# Altium PCB Sinistro_TestBed_RevA-1.PcbDoc (part 4 of 4)
Units mil, origin at the board's own origin, x right, y up, seen from the top; angles counter-clockwise.
Board outline 17000 x 8000 mil, 7 copper layers (Top Layer (*.GTL), MidLayer1 (*.G1), MidLayer2 (*.G2), MidLayer3 (*.G3), DIG GND (*.GP1), AGND (*.GP2), Bottom Layer (*.GBL)); 262 components, 309 nets, 2223 pads, 663 vias.
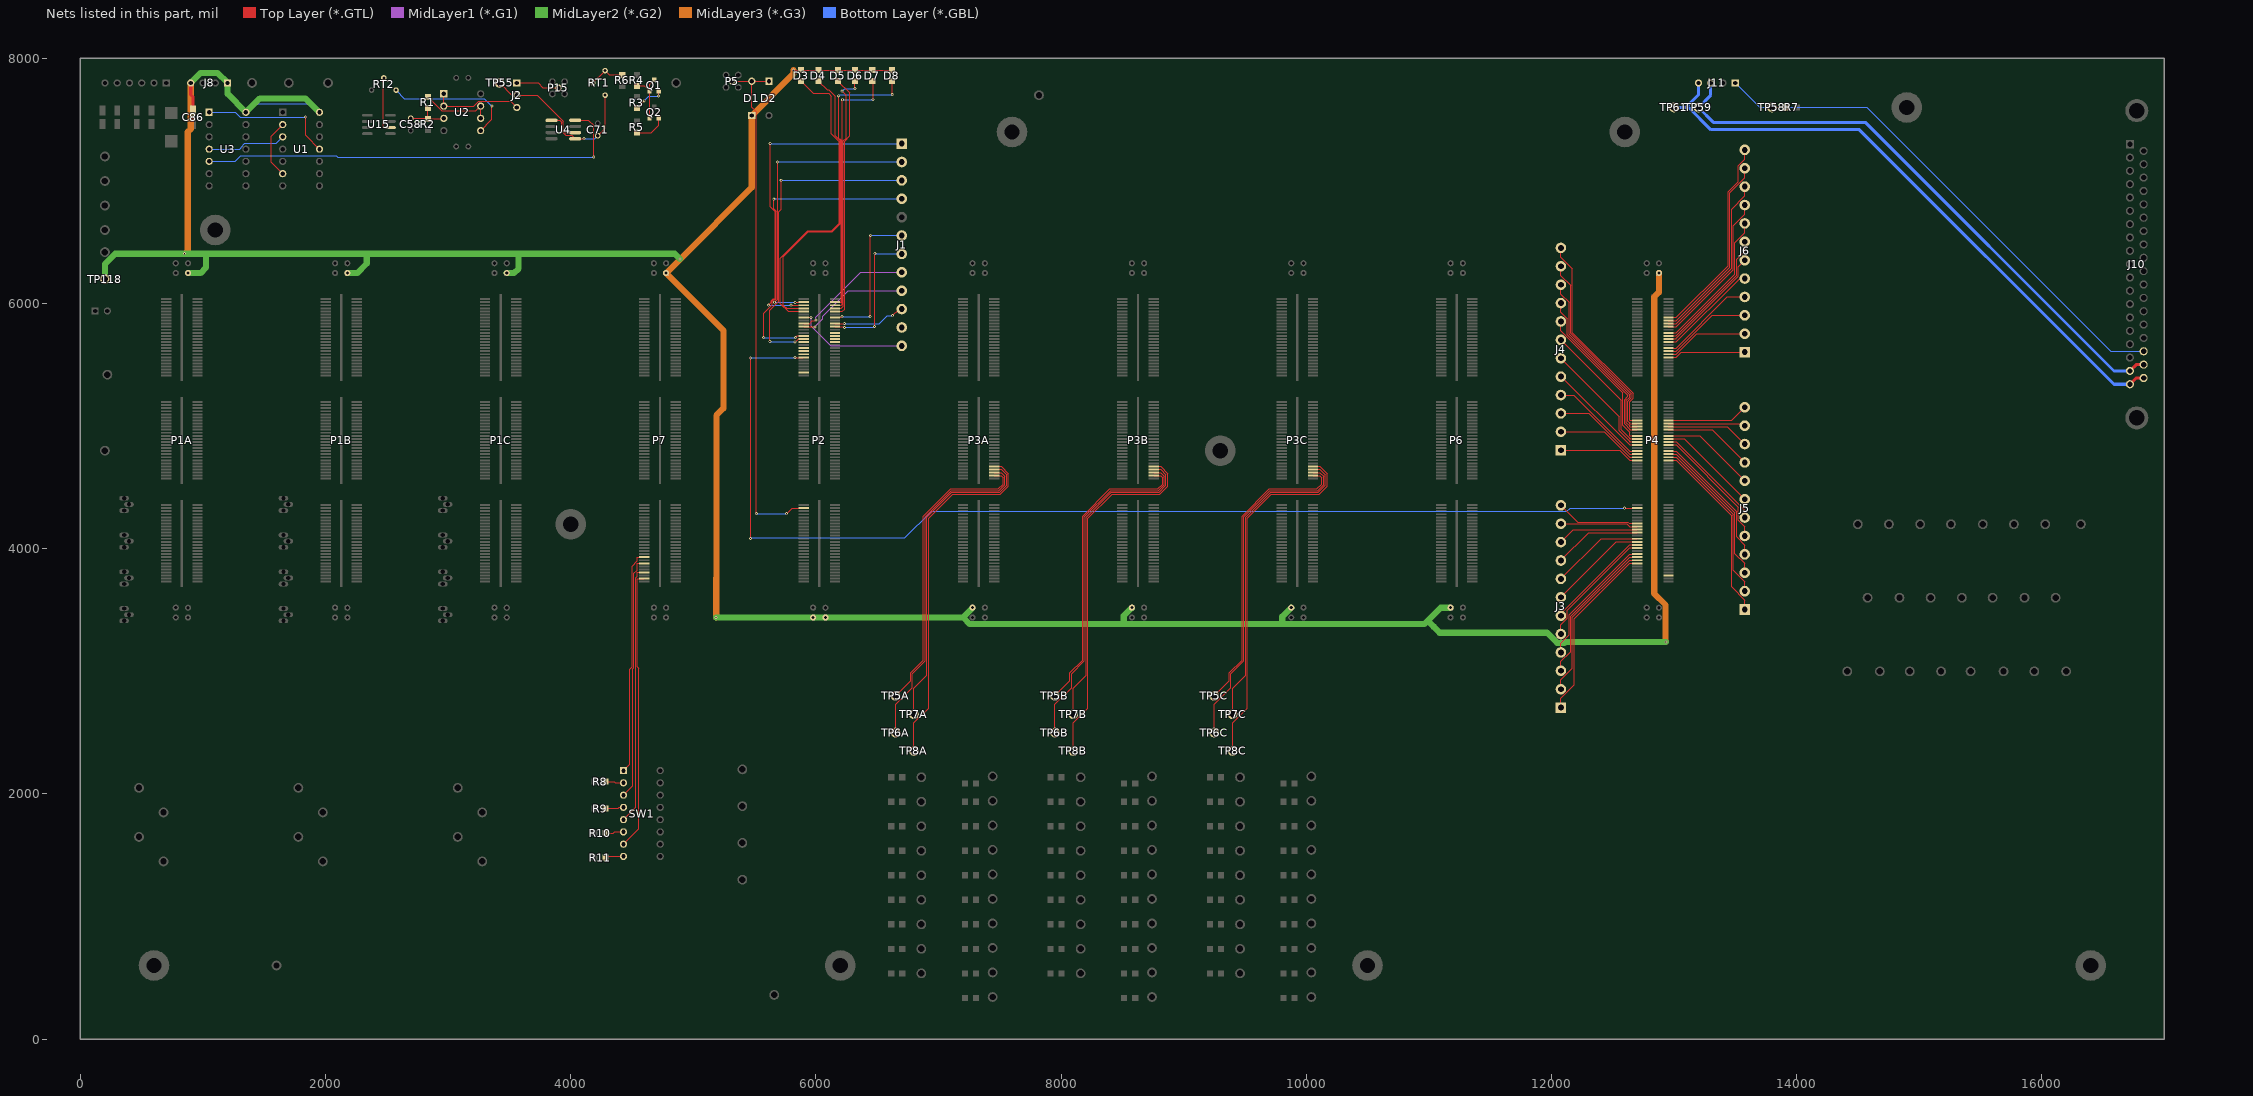
[diagram p9: the nets of this part, all layers, seen from the top]

## Via types
v1: diameter 24, hole 10, Top Layer (*.GTL) to Bottom Layer (*.GBL), 662 vias
v2: diameter 10, hole 10, Top Layer (*.GTL) to Bottom Layer (*.GBL), 1 vias

## Nets (pads, with @x,y where several pads share a name; then routed paths per layer and width w, separated by ;. In a path a pad name is that pad's centre, name@x,y a point inside that pad or via, vN(x,y) a via of type N, cw(c..) or ccw(c..) an arc to the next point about the centre after c; other vN are vias at no path point) (continued)
GPS_1HZ: D1.1 D2.2 P2.49 P5.1 | length 4249.3
  Top Layer (*.GTL) w5: P5.1@5317,7814 5317.24,7813.76 D1.1@5477,7813.76 ; v1@5511,4286 5513.03,4288.03 5513.03,7566.46 5477,7602.48 D1.1@5477,7813.76 ; D2.2@5617,7813.76 D1.1@5477,7813.76 ; v1(5761,4286) 5761,4287 5805.26,4331.26 P2.49@5900.4,4331.26
  Bottom Layer (*.GBL) w5: v1(5514.03,4286) v1(5761,4286)
I_ADDR0_A: P2.107
LED_1: D3.CATH P2.147 | length 2548.2
  Top Layer (*.GTL) w5: D3.CATH@5880,7815 5980,7715 6104,7715 6126,7693 6126,7385.27 6185.27,7326 6189,7326 6189,6655 6129,6595 5934.27,6595 5709,6369.73 5709,6000.27 5772.7,5936.58 P2.147@5900.4,5936.58
LED_2: D4.CATH P2.149 | length 2393.9
  Top Layer (*.GTL) w5: P2.149@5900.4,5961.58 5760.43,5961.58 5735,5987 5735,6383 5938,6586 6132.73,6586 6198,6651.27 6198,7329.73 6192.73,7335 6189,7335 6156,7368 6156,7693 6105,7744 6091,7744 D4.CATH@6020,7815
LED_3: D5.CATH P2.148 | length 2003.3
  Top Layer (*.GTL) w5: P2.148@6155.52,5936.58 6215.57,5936.58 6234,5955 6234,7326 6276,7368 6276,7719 D5.CATH@6180,7815
LED_4: D6.CATH P2.150 | length 2026.3
  Top Layer (*.GTL) w5: P2.150@6155.52,5961.58 6207,5961.58 6225,5979.58 6225,7329.73 6246,7350.73 6246,7701 v1(6214,7733) ; v1(6318,7755) 6318,7813 D6.CATH@6320,7815
  Bottom Layer (*.GBL) w5: v1(6214,7733) 6235,7754 6317,7754 v1(6318,7755)
LED_5: D7.CATH P2.152 | length 2134.4
  Top Layer (*.GTL) w5: P2.152@6155.52,5986.58 6207,5986.58 6216,5995.58 v1(6216,7663) ; D7.CATH@6460,7815 6466,7809 v1(6466,7666)
  Bottom Layer (*.GBL) w5: v1(6216,7663) 6463,7663 v1(6466,7666)
LED_6: D8.CATH P2.154 | length 2298.8
  Top Layer (*.GTL) w5: P2.154@6155.52,6011.58 6207,6011.58 6207,7333.46 6196.46,7344 6192.73,7344 6186,7350.73 v1(6186,7695) ; D8.CATH@6620,7815 6623,7812 v1(6623,7704)
  Bottom Layer (*.GBL) w5: v1(6186,7695) 6195,7704 v1(6623,7704)
NetC58_2: C58.2 R1.1 R2.2 U2.3 | length 364.1
  Top Layer (*.GTL) w10: C58.2@2695,7511 2830,7511 R2.2@2835,7506 ; R1.1@2835,7596 R2.2@2835,7506 ; U2.3@2965,7511 2960,7506 R2.2@2835,7506
NetC71_1: C71.1 RT1.1 U4.1 U4.5 | length 847.7
  Top Layer (*.GTL) w10: U4.1@3843.54,7495 3911.2,7495 3926,7480.2 3926,7405.2 3958.98,7372.22 4009.24,7372.22 U4.5@4036.46,7345 v1(4109,7345) ; C71.1@4220,7370 4280,7430 RT1.1@4280,7700
  Bottom Layer (*.GBL) w10: v1(4109,7345) 4195,7345 C71.1@4220,7370
NetJ2_1: J2.1 P15.1 | length 356.6
  Top Layer (*.GTL) w10: J2.1@3560,7800 3733,7800 3773,7760 P15.1@3900,7760
NetJ2_2: J2.2 TP55.1 U4.6 | length 828.1
  Top Layer (*.GTL) w10: TP55.1@3420,7800 3520,7700 J2.2@3560,7700 3726,7700 3940,7486 3940,7411 3956,7395 U4.6@4036.46,7395
NetJ2_3: J2.3 U2.1 U2.2 | length 731.5
  Top Layer (*.GTL) w10: U2.1@2965,7711 U2.2@2965,7611 3210.51,7611 3249.04,7649.53 3510.47,7649.53 J2.3@3560,7600
NetJ3_1: J3.1 P4.13 | length 1532.5
  Top Layer (*.GTL) w10: J3.1@12077.96,2704.02 12077.96,2780.04 12186.27,2888.35 12186.27,3428.54 12638.98,3881.26 ; 12638.98,3881.26 P4.13@12700.4,3881.26 12638.98,3881.26
NetJ3_2: J3.2 P4.15 | length 1407.5
  Top Layer (*.GTL) w10: J3.2@12077.96,2854.02 12077.96,2930.04 12172.27,3024.35 12172.27,3439.54 12638.98,3906.26 ; 12638.98,3906.26 P4.15@12700.4,3906.26 12638.98,3906.26
NetJ3_3: J3.3 P4.17 | length 1282.5
  Top Layer (*.GTL) w10: J3.3@12077.96,3004.02 12077.96,3080.04 12158.27,3160.35 12158.27,3450.54 12638.98,3931.26 ; 12638.98,3931.26 P4.17@12700.4,3931.26 12638.98,3931.26
NetJ3_4: J3.4 P4.19 | length 1157.5
  Top Layer (*.GTL) w10: J3.4@12077.96,3154.02 12077.96,3230.04 12144.27,3296.35 12144.27,3461.54 12638.98,3956.26 ; 12638.98,3956.26 P4.19@12700.4,3956.26 12638.98,3956.26
NetJ3_5: J3.5 P4.23 | length 1057.5
  Top Layer (*.GTL) w10: J3.5@12077.96,3304.02 12077.96,3380.04 12130.27,3432.35 12130.27,3497.54 12638.98,4006.26 ; 12638.98,4006.26 P4.23@12700.4,4006.26 12638.98,4006.26
NetJ3_6: J3.6 P4.25 | length 932.5
  Top Layer (*.GTL) w10: J3.6@12077.96,3454.02 12077.96,3470.24 12638.98,4031.26 ; 12638.98,4031.26 P4.25@12700.4,4031.26 12638.98,4031.26
NetJ3_7: J3.7 P4.27 | length 871.2
  Top Layer (*.GTL) w10: J3.7@12077.96,3604.02 12530.2,4056.26 P4.27@12700.4,4056.26 12638.98,4056.26
NetJ3_8: J3.8 P4.29 | length 819.4
  Top Layer (*.GTL) w10: J3.8@12077.96,3754.02 12405.2,4081.26 P4.29@12700.4,4081.26 12638.98,4081.26
NetJ3_9: J3.9 P4.33 | length 778
  Top Layer (*.GTL) w10: J3.9@12077.96,3904.02 12305.2,4131.26 P4.33@12700.4,4131.26 12638.98,4131.26
NetJ3_10: J3.10 P4.35 | length 726.2
  Top Layer (*.GTL) w10: J3.10@12077.96,4054.02 12180.2,4156.26 P4.35@12700.4,4156.26 12638.98,4156.26
NetJ3_11: J3.11 P4.37 | length 693.3
  Top Layer (*.GTL) w10: J3.11@12077.96,4204.02 12616.23,4204.02 12638.98,4181.26 ; 12638.98,4181.26 P4.37@12700.4,4181.26 12638.98,4181.26
NetJ3_12: J3.12 P4.39 | length 745.1
  Top Layer (*.GTL) w10: J3.12@12077.96,4354.02 12213.96,4218.02 12622.03,4218.02 12633.78,4206.26 P4.39@12700.4,4206.26 12638.98,4206.26
NetJ4_1: J4.1 P4.65 | length 656.7
  Top Layer (*.GTL) w10: J4.1@12077.96,4804.02 12556.39,4804.02 12638.98,4721.42 P4.65@12700.4,4721.42
NetJ4_2: J4.2 P4.67 | length 708.4
  Top Layer (*.GTL) w10: J4.2@12077.96,4954.02 12431.39,4954.02 12638.98,4746.42 P4.67@12700.4,4746.42
NetJ4_3: J4.3 P4.69 | length 760.2
  Top Layer (*.GTL) w10: J4.3@12077.96,5104.02 12306.39,5104.02 12638.98,4771.42 P4.69@12700.4,4771.42
NetJ4_4: J4.4 P4.71 | length 812
  Top Layer (*.GTL) w10: J4.4@12077.96,5254.02 12181.39,5254.02 12638.98,4796.42 P4.71@12700.4,4796.42
NetJ4_5: J4.5 P4.75 | length 853.4
  Top Layer (*.GTL) w10: J4.5@12077.96,5404.02 12081.39,5404.02 12638.98,4846.42 P4.75@12700.4,4846.42
NetJ4_6: J4.6 P4.77 | length 976.4
  Top Layer (*.GTL) w10: J4.6@12077.96,5554.02 12554.98,5076.99 12554.98,4960.62 12638.98,4876.62 12638.98,4871.42 P4.77@12700.4,4871.42
NetJ4_7: J4.7 P4.79 | length 1101.4
  Top Layer (*.GTL) w10: J4.7@12077.96,5704.02 12568.98,5212.99 12568.98,4971.62 12638.98,4901.62 12638.98,4896.42 P4.79@12700.4,4896.42
NetJ4_8: J4.8 P4.81 | length 1226.4
  Top Layer (*.GTL) w10: J4.8@12077.96,5854.02 12077.96,5777.99 12582.98,5272.97 12582.98,5007.62 12638.98,4951.62 12638.98,4921.42 P4.81@12700.4,4921.42
NetJ4_9: J4.9 P4.85 | length 1349.6
  Top Layer (*.GTL) w10: J4.9@12077.96,6004.02 12077.96,5927.99 12130.27,5875.68 12130.27,5745.48 12624.98,5250.76 12624.98,5243.32 12596.98,5215.32 12596.98,5018.62 12638.98,4976.62 12638.98,4971.42 P4.85@12700.4,4971.42
NetJ4_10: J4.10 P4.87 | length 1474.6
  Top Layer (*.GTL) w10: J4.10@12077.96,6154.02 12077.96,6077.99 12144.27,6011.68 12144.27,5751.28 12638.98,5256.56 12638.98,5237.52 12610.98,5209.52 12610.98,5029.62 12638.98,5001.62 12638.98,4996.42 P4.87@12700.4,4996.42
NetJ4_11: J4.11 P4.89 | length 1599.6
  Top Layer (*.GTL) w10: J4.11@12077.96,6304.02 12077.96,6227.99 12158.27,6147.68 12158.27,5757.08 12652.98,5262.36 12652.98,5231.72 12624.98,5203.72 12624.98,5040.62 12638.98,5026.62 12638.98,5021.42 P4.89@12700.4,5021.42
NetJ4_12: J4.12 P4.91 | length 1724.6
  Top Layer (*.GTL) w10: J4.12@12077.96,6454.02 12077.96,6377.99 12172.27,6283.68 12172.27,5762.88 12666.98,5268.16 12666.98,5225.92 12638.98,5197.92 12638.98,5046.42 P4.91@12700.4,5046.42
NetJ5_1: J5.1 P4.66 | length 1512.4
  Top Layer (*.GTL) w10: P4.66@12955.52,4721.42 13018.91,4721.42 13469.65,4270.67 13469.65,3688.35 13577.96,3580.04 J5.1@13577.96,3504.02
NetJ5_2: J5.2 P4.68 | length 1387.4
  Top Layer (*.GTL) w10: P4.68@12955.52,4746.42 13018.91,4746.42 13483.65,4281.67 13483.65,3824.35 13577.96,3730.04 J5.2@13577.96,3654.02
NetJ5_3: J5.3 P4.70 | length 1262.4
  Top Layer (*.GTL) w10: P4.70@12955.52,4771.42 13018.91,4771.42 13497.65,4292.67 13497.65,3960.35 13577.96,3880.04 J5.3@13577.96,3804.02
NetJ5_4: J5.4 P4.72 | length 1137.4
  Top Layer (*.GTL) w10: P4.72@12955.52,4796.42 13018.91,4796.42 13511.65,4303.67 13511.65,4096.35 13577.96,4030.04 J5.4@13577.96,3954.02
NetJ5_5: J5.5 P4.76 | length 1037.4
  Top Layer (*.GTL) w10: P4.76@12955.52,4846.42 13018.91,4846.42 13525.65,4339.67 13525.65,4232.35 13577.96,4180.04 J5.5@13577.96,4104.02
NetJ5_6: J5.6 P4.78 | length 912.4
  Top Layer (*.GTL) w10: P4.78@12955.52,4871.42 13018.91,4871.42 13577.96,4312.36 J5.6@13577.96,4254.02
NetJ5_7: J5.7 P4.80 | length 826.4
  Top Layer (*.GTL) w10: P4.80@12955.52,4896.42 13085.56,4896.42 J5.7@13577.96,4404.02
NetJ5_8: J5.8 P4.82 | length 774.6
  Top Layer (*.GTL) w10: P4.82@12955.52,4921.42 13210.56,4921.42 J5.8@13577.96,4554.02
NetJ5_9: J5.9 P4.86 | length 733.2
  Top Layer (*.GTL) w10: P4.86@12955.52,4971.42 13310.56,4971.42 J5.9@13577.96,4704.02
NetJ5_10: J5.10 P4.88 | length 681.4
  Top Layer (*.GTL) w10: P4.88@12955.52,4996.42 13435.56,4996.42 J5.10@13577.96,4854.02
NetJ5_11: J5.11 P4.90 | length 629.6
  Top Layer (*.GTL) w10: P4.90@12955.52,5021.42 13560.56,5021.42 J5.11@13577.96,5004.02
NetJ5_12: J5.12 P4.92 | length 667
  Top Layer (*.GTL) w10: P4.92@12955.52,5046.42 13470.36,5046.42 J5.12@13577.96,5154.02
NetJ6_1: J6.1 P4.118 | length 640
  Top Layer (*.GTL) w10: P4.118@12955.52,5561.58 13018.91,5561.58 13061.35,5604.02 J6.1@13577.96,5604.02
NetJ6_2: J6.2 P4.120 | length 691.8
  Top Layer (*.GTL) w10: P4.120@12955.52,5586.58 13018.91,5586.58 13186.35,5754.02 J6.2@13577.96,5754.02
NetJ6_3: J6.3 P4.122 | length 743.6
  Top Layer (*.GTL) w10: P4.122@12955.52,5611.58 13018.91,5611.58 13311.35,5904.02 J6.3@13577.96,5904.02
NetJ6_4: J6.4 P4.124 | length 795.4
  Top Layer (*.GTL) w10: P4.124@12955.52,5636.58 13018.91,5636.58 13436.35,6054.02 J6.4@13577.96,6054.02
NetJ6_5: J6.5 P4.128 | length 836.8
  Top Layer (*.GTL) w10: P4.128@12955.52,5686.58 13018.91,5686.58 13536.35,6204.02 J6.5@13577.96,6204.02
NetJ6_6: J6.6 P4.130 | length 937.4
  Top Layer (*.GTL) w10: P4.130@12955.52,5711.58 13018.91,5711.58 13018.91,5716.78 13525.65,6223.52 13525.65,6301.71 J6.6@13577.96,6354.02
NetJ6_7: J6.7 P4.132 | length 1062.4
  Top Layer (*.GTL) w10: P4.132@12955.52,5736.58 13018.91,5736.58 13511.65,6229.32 13511.65,6361.68 13577.96,6427.99 J6.7@13577.96,6504.02
NetJ6_8: J6.8 P4.134 | length 1187.4
  Top Layer (*.GTL) w10: P4.134@12955.52,5761.58 13018.91,5761.58 13497.65,6240.32 13497.65,6497.68 13577.96,6577.99 J6.8@13577.96,6654.02
NetJ6_9: J6.9 P4.138 | length 1287.4
  Top Layer (*.GTL) w10: P4.138@12955.52,5811.58 13018.91,5811.58 13483.65,6276.32 13483.65,6633.68 13577.96,6727.99 J6.9@13577.96,6804.02
NetJ6_10: J6.10 P4.140 | length 1412.4
  Top Layer (*.GTL) w10: P4.140@12955.52,5836.58 13018.91,5836.58 13469.65,6287.32 13469.65,6769.68 13577.96,6877.99 J6.10@13577.96,6954.02
NetJ6_11: J6.11 P4.142 | length 1537.4
  Top Layer (*.GTL) w10: P4.142@12955.52,5861.58 13018.91,5861.58 13455.65,6298.32 13455.65,6905.68 13577.96,7027.99 J6.11@13577.96,7104.02
NetJ6_12: J6.12 P4.144 | length 1662.4
  Top Layer (*.GTL) w10: P4.144@12955.52,5886.58 13018.91,5886.58 13441.65,6309.32 13441.65,6911.48 13525.65,6995.48 13525.65,7125.68 13577.96,7177.99 J6.12@13577.96,7254.02
NetP7_3: P7.3 SW1.7 | length 2279.8
  Top Layer (*.GTL) w10: SW1.7@4430,1590 4556,1716 4556,3024 4544,3036 4544,3756.26 P7.3@4600.4,3756.26
NetP7_7: P7.7 SW1.5 | length 2120.7
  Top Layer (*.GTL) w10: SW1.5@4430,1790 4531,1891 4531,3013.64 4530,3014.64 4530,3762.06 4544,3776.06 4544,3806.26 P7.7@4600.4,3806.26
NetP7_13: P7.13 SW1.3 | length 1994.9
  Top Layer (*.GTL) w10: SW1.3@4430,1990 4506,2066 4506,3020.2 4516,3030.2 4516,3798.06 4544,3826.06 4544,3881.26 P7.13@4600.4,3881.26
NetP7_17: P7.17 SW1.1 | length 1844.9
  Top Layer (*.GTL) w10: SW1.1@4430,2190 4481,2241 4481,3015 4502,3036 4502,3859.06 4544,3901.06 4544,3931.26 P7.17@4600.4,3931.26
NetQ1_1: Q1.1 Q1.3 Q2.3 R4.2 | length 447.7
  Top Layer (*.GTL) w10: R4.2@4540,7775 4601.34,7775 Q1.3@4642.6,7733.74 ; Q2.3@4642.6,7513.74 Q1.3@4642.6,7733.74 ; Q1.1@4680,7826.26 4642.6,7788.86 Q1.3@4642.6,7733.74
NetQ1_2: Q1.2 R3.1 | length 258.5
  Top Layer (*.GTL) w10: R3.1@4540,7595 v1(4599,7654) ; v1(4717,7693) 4717,7733.34 Q1.2@4717.4,7733.74
  Bottom Layer (*.GBL) w10: v1(4599,7654) 4638,7693 v1(4717,7693)
NetQ2_2: Q2.2 R5.1 | length 260.8
  Top Layer (*.GTL) w10: R5.1@4540,7395 4657,7395 4717.4,7455.4 Q2.2@4717.4,7513.74
NetR1_2: R1.2 U2.6 U2.7 | length 593
  Top Layer (*.GTL) w10: R1.2@2835,7686 2948.53,7572.47 3226.47,7572.47 U2.7@3265,7611 U2.6@3265,7511
NetR6_1: R6.1 RT1.2 RT1.3 | length 295.9
  Top Layer (*.GTL) w10: RT1.2@4180,7800 RT1.3@4280,7900 4315,7865 R6.1@4420,7865
NetR8_2: R8.2 SW1.2 | length 149.1
  Top Layer (*.GTL) w10: R8.2@4285,2100 4353,2100 4363,2090 SW1.2@4430,2090
NetR9_2: R9.2 SW1.4 | length 149.1
  Top Layer (*.GTL) w10: R9.2@4285,1880 4286,1881 4387,1881 4396,1890 SW1.4@4430,1890
NetR10_2: R10.2 SW1.6 | length 151.6
  Top Layer (*.GTL) w10: R10.2@4285,1680 4344,1680 4347,1677 4360,1690 SW1.6@4430,1690
NetR11_2: R11.2 SW1.8 | length 149.1
  Top Layer (*.GTL) w10: R11.2@4285,1480 4295,1490 SW1.8@4430,1490
NetRT2_2: RT2.2 U15.6 | length 457.3
  Top Layer (*.GTL) w10: RT2.2@2475,7841 2472,7838 2472,7447 2483,7436 U15.6@2529.49,7436
NetRT2_3: RT2.3 U2.5 | length 1074
  Top Layer (*.GTL) w10: U2.5@3265,7411 3357,7503 v1(3357,7611)
  Bottom Layer (*.GBL) w10: RT2.3@2575,7741 2643.53,7672.47 3295.53,7672.47 v1(3357,7611)
NetU1_2: U1.2 U1.6 | length 477.9
  Top Layer (*.GTL) w10: U1.6@1650,7060 1556,7154 1556,7366 U1.2@1650,7460
NetU1_3: U1.3 U3.4 | length 643.5
  Bottom Layer (*.GBL) w10: U3.4@1050,7260 1299.05,7260 1311.47,7272.42 1311.47,7275.96 1342.51,7307 1597,7307 U1.3@1650,7360
NetU1_11: U1.11 U3.1 | length 1111.5
  Top Layer (*.GTL) w10: v1(1838,7521) 1838,7372 U1.11@1950,7260
  Bottom Layer (*.GBL) w10: U3.1@1050,7560 1263,7560 1302,7521 v1(1838,7521)
NetU3_5: U3.5 U4.8 | length 3592.9
  Top Layer (*.GTL) w10: U4.8@4036.46,7495 4038.46,7497 4143,7497 4186,7454 4186,7197 v1(4188,7195)
  Bottom Layer (*.GBL) w10: U3.5@1050,7160 1263,7160 1310,7207 2086.74,7207 2099.24,7194.5 2101.74,7192 4181,7192 4183.5,7194.5 4184,7195 v1(4188,7195)
RESET_N: P4.6
RS2+: J1.3 P2.129 | length 2623.9
  Top Layer (*.GTL) w5: v1(5624,5690) 5624,5946.84 5696,6018.84 5696,6749 5717,6770 v1@5717,7005 ; v1(5829,5688) 5836,5688 5859.57,5711.58 P2.129@5900.4,5711.58
  Bottom Layer (*.GBL) w5: v1(5624,5690) 5626,5688 v1(5829,5688) ; v1(5717,7006) 5718,7005 J1.3@6700,7005
RS2-: J1.4 P2.131 | length 2568.9
  Top Layer (*.GTL) w5: v1(5574,5722) 5574,5919.84 5643.5,5989.34 5643.5,6018.66 5654.34,6029.5 5667.07,6029.5 5678,6040.44 5678,6752.73 5657,6773.73 v1@5657,6855 ; v1(5834.85,5722) 5849.43,5736.58 P2.131@5900.4,5736.58
  Bottom Layer (*.GBL) w5: v1(5574,5722) v1(5834.85,5722) ; v1(5657,6852) 5660,6855 J1.4@6700,6855
RS+: J1.1 P2.151 | length 2723.8
  Top Layer (*.GTL) w5: v1(5615,5987) 5615,5990.16 5634.5,6009.66 5634.5,6022.39 5650.61,6038.5 5663.34,6038.5 5669,6044.16 5669,6749 5627,6791 v1(5627,7305) ; v1(5798,5987) 5798.43,5986.58 P2.151@5900.4,5986.58
  Bottom Layer (*.GBL) w5: v1(5615,5987) v1(5798,5987) ; v1(5627,7305) J1.1@6700,7305
RS-: J1.2 P2.153 | length 2406.7
  Top Layer (*.GTL) w5: v1(5662,6011) 5662,6011.71 5687,6036.71 v1@5687,7155 ; v1(5831,6009) 5833.57,6011.58 P2.153@5900.4,6011.58
  Bottom Layer (*.GBL) w5: v1(5662,6011) 5664,6009 v1(5831,6009) ; v1(5688,7155) J1.2@6700,7155
S_WIRED_2: P2.134
SHUT_ON: J1.10 P2.140 | length 593.5
  Top Layer (*.GTL) w5: P2.140@6155.52,5836.58 6231.57,5836.58 v1(6232,5837) ; v1(6625,5901) 6679,5955 J1.10@6700,5955
  Bottom Layer (*.GBL) w5: v1(6232,5837) 6517,5837 6581,5901 v1(6625,5901)
SHUT_STAT: J1.9 P2.137 | length 936
  Top Layer (*.GTL) w5: P2.137@5900.4,5811.58 5990.43,5811.58 v1(5992,5810)
  MidLayer1 (*.G1) w5: v1(5992,5810) 6056.5,5874.5 6056.5,5897.66 6263.84,6105 J1.9@6700,6105
SHUT_VCC: J1.7 P2.138 | length 1145
  Top Layer (*.GTL) w5: P2.138@6155.52,5811.58 6226.43,5811.58 v1(6233,5805) v1@6234,5804 ; v1(6479,5814) 6479,6405 v1(6481,6407)
  Bottom Layer (*.GBL) w5: v1(6233,5805) 6470,5805 v1(6479,5814) ; v1(6481,6407) 6698,6407 J1.7@6700,6405
SHUTTER_GND: J1.8 P2.139 | length 987.9
  Top Layer (*.GTL) w5: P2.139@5900.4,5836.58 5948.57,5836.58 5970,5858 5990,5858 5999,5867 v1(6000,5866)
  MidLayer1 (*.G1) w5: v1(6000,5866) 6000,5890.16 6364.84,6255 J1.8@6700,6255
"SPARE _INPUT_1": J1.12 P2.143 | length 946.4
  Top Layer (*.GTL) w5: P2.143@5900.4,5886.58 v1(5960.57,5886.58) v1@5967,5893
  MidLayer1 (*.G1) w5: v1(5960.57,5886.58) 5960.57,5815.26 6120.84,5655 J1.12@6700,5655
"SPARE _INPUT_2": J1.6 P2.144 | length 1215.4
  Top Layer (*.GTL) w5: P2.144@6155.52,5886.58 6207.57,5886.58 v1(6214,5893) 6216,5895 v1@6218.91,5895 ; v1(6443,5893) 6443,6553 v1(6447,6557)
  Bottom Layer (*.GBL) w5: v1(6214,5893) v1(6443,5893) ; v1(6447,6557) 6698,6557 J1.6@6700,6555
SPARE_1_SEL_N: J1.11
SWRD_1_SEL_N: P2.127
SWRD_2_SEL_N: P2.128
SWRD_3_SEL_N: P2.130
SWRD_4_SEL_N: P2.132
SWRD_5_SEL_N: P2.119
SWRD_6_SEL_N: P2.121
SWRD_7_SEL_N: P2.123
TEC(+): J10.18 J10.36 J11.3 TP59.1 | length 4784.7
  Top Layer (*.GTL) w25: J10.18@16720,5450.59 16771.06,5501.65 J10.36@16831.81,5501.65
  Bottom Layer (*.GBL) w25: J11.3@13300,7800 13300,7700 TP59.1@13200,7600 13321,7479 14561.59,7479 16590,5450.59 J10.18@16720,5450.59
TEC(-): J10.19 J10.37 J11.4 TP61.1 | length 5031.1
  Top Layer (*.GTL) w25: J10.19@16720,5341.59 16771.06,5392.65 J10.37@16831.81,5392.65
  Bottom Layer (*.GBL) w25: TP61.1@13000,7600 13097,7600 ; J11.4@13200,7800 13200,7703 13097,7600 ; J10.19@16720,5341.59 16590,5341.59 14512.59,7419 13301.1,7419 13120.1,7600 13097,7600
TEMP: J10.35 J11.1 R7.2 TP58.1 | length 4353.7
  Top Layer (*.GTL) w10: TP58.1@13800,7600 R7.2@13915,7600
  Bottom Layer (*.GBL) w10: J11.1@13500,7800 13700,7600 TP58.1@13800,7600 14573,7600 16562.35,5610.65 J10.35@16831.81,5610.65
TT_SEL_N: P2.117 P4.49 | length 9251.1
  Top Layer (*.GTL) w5: v1(5465,5557) 5467,5555 v1(5467,4083) ; v1(5830,5559) 5897.83,5559 P2.117@5900.4,5561.58 ; v1(12597,4331) 12597.26,4331.26 P4.49@12700.4,4331.26
  Bottom Layer (*.GBL) w5: v1(5465,5557) 5828,5557 v1(5830,5559) ; v1(5467,4083) 5471.76,4087.76 6723.92,4087.76 6943.66,4307.5 11679.66,4307.5 11682.95,4304.21 12125.38,4304.21 12152.17,4331 v1(12597,4331)
VCC: C86.1 D1.2 D3.ANOD D4.ANOD D5.ANOD D6.ANOD D7.ANOD D8.ANOD J8.1 J8.4 P1A.PC06 P1B.PC06 P1C.PC06 P2.PC01 P2.PC02 P3A.PC06 P3B.PC06 P3C.PC06 P4.PC06 P6.PC06 P7.PC06 TP118.1 U1.14 U3.14 | length 26852.5
  Top Layer (*.GTL) w5: v1(5816,7904) 5817,7905 D3.ANOD@5880,7905 D4.ANOD@6020,7905 D5.ANOD@6180,7905 D6.ANOD@6320,7905 D7.ANOD@6460,7905 D8.ANOD@6620,7905
  Top Layer (*.GTL) w25: J8.4@900,7800 900,7705 920,7685 C86.1@920,7575
  MidLayer2 (*.G2) w50: TP118.1@200,6200 200,6322.42 284.58,6407 1022,6407 ; P1A.PC06@877.96,6249.02 980.02,6249.02 1024,6293 1024,6405 1022,6407 ; J8.4@900,7800 982,7882 1118,7882 J8.1@1200,7800 1200,7710 U3.14@1350,7560 1464,7674 1836,7674 U1.14@1950,7560 ; P1B.PC06@2177.96,6249.02 2258.02,6249.02 2336,6327 2336,6407 ; P1C.PC06@3477.96,6249.02 3537.02,6249.02 3574,6286 3574,6404 3577,6407 ; v1(4892.07,6363.13) 4848.2,6407 3577,6407 ; v1(5185,3439.02) P2.PC01@5977.96,3439.02 P2.PC02@6077.96,3439.02 7201.59,3439.02 ; P3A.PC06@7277.96,3519.02 7201.59,3442.65 7201.59,3439.02 ; P3B.PC06@8577.96,3519.02 8512,3453.06 8512,3385.02 ; P3C.PC06@9877.96,3519.02 9805,3446.06 9805,3385.02 ; 11043.38,3364.38 11041,3362 ; P6.PC06@11177.96,3519.02 11097.38,3519.02 10989.68,3411.32 ; v1(12934,3239) 12115.2,3239 12107.91,3231.71 12048.01,3231.71 11964.72,3315 11088,3315 11041,3362 ; 1022,6407 2336,6407 ; 2336,6407 3577,6407 ; 7201.59,3439.02 7255.59,3385.02 8512,3385.02 ; 8512,3385.02 9805,3385.02 ; 9805,3385.02 10963.38,3385.02 10989.68,3411.32 ; 10989.68,3411.32 10991.68,3411.32 11041,3362
  MidLayer3 (*.G3) w50: v1(849,6407) 875,6407 876,6408 876,7399.98 900,7423.98 J8.4@900,7800 ; v1@5187,3439.02 5187,3760 5188,3761 5188,5087.4 5245.42,5144.82 5245.42,5781.56 P7.PC06@4777.96,6249.02 v1(4892.07,6363.13) 5477,6948.06 D1.2@5477,7534.24 5816,7873.24 v1(5816,7904) ; P4.PC06@12877.96,6249.02 12877.96,6092.72 12839,6053.75 12839,3633.84 12931.96,3540.88 v1@12931.96,3239
  Bottom Layer (*.GBL) w10: U3.14@1350,7560 1422,7632 1878,7632 U1.14@1950,7560
VDDA: P3A.101 TP5A.1 | length 2451.5
  Top Layer (*.GTL) w10: TP5A.1@6650,2800 6772,2922 6772,2986.6 6877,3091.6 6877,4266.4 7098.6,4488 7488,4488 7528,4528 7528,4580.61 7512,4596.61 P3A.101@7455.52,4596.61
VDDB: P3B.101 TP5B.1 | length 2840.9
  Top Layer (*.GTL) w10: TP5B.1@7950,2800 8072,2922 8072,2986.6 8177,3091.6 8177,4266.4 8398.6,4488 ; P3B.101@8755.52,4596.61 8812,4596.61 8828,4580.61 8828,4528 8788,4488 ; 8398.6,4488 8788,4488 ; 8398.6,4488 8788,4488
VDDC: P3C.101 TP5C.1 | length 2840.9
  Top Layer (*.GTL) w10: TP5C.1@9250,2800 9372,2922 9372,2986.6 9477,3091.6 9477,4266.4 9698.6,4488 ; P3C.101@10055.52,4596.61 10112,4596.61 10128,4580.61 10128,4528 10088,4488 ; 9698.6,4488 10088,4488 ; 9698.6,4488 10088,4488
VODA: P3A.95 TP8A.1 | length 2949.2
  Top Layer (*.GTL) w10: TP8A.1@6800,2350 6800,2580.7 6919,2699.7 6919,4249 7116,4446 7505.4,4446 7570,4510.6 7570,4613.61 7512,4671.61 P3A.95@7455.52,4671.61
VODB: P3B.95 TP8B.1 | length 3338.6
  Top Layer (*.GTL) w10: TP8B.1@8100,2350 8100,2580.7 8219,2699.7 8219,4249 8416,4446 ; P3B.95@8755.52,4671.61 8812,4671.61 8870,4613.61 8870,4510.6 8805.4,4446 ; 8416,4446 8805.4,4446 ; 8416,4446 8805.4,4446
VODC: P3C.95 TP8C.1 | length 3338.6
  Top Layer (*.GTL) w10: TP8C.1@9400,2350 9400,2580.7 9519,2699.7 9519,4249 9716,4446 ; P3C.95@10055.52,4671.61 10112,4671.61 10170,4613.61 10170,4510.6 10105.4,4446 ; 9716,4446 10105.4,4446 ; 9716,4446 10105.4,4446
VOGA: P3A.99 TP6A.1 | length 2788.1
  Top Layer (*.GTL) w10: TP6A.1@6650,2500 6650,2730.7 6786,2866.7 6786,2980.8 6891,3085.8 6891,4260.6 7104.4,4474 7493.8,4474 7542,4522.2 7542,4591.61 7512,4621.61 P3A.99@7455.52,4621.61
VOGB: P3B.99 TP6B.1 | length 3177.5
  Top Layer (*.GTL) w10: TP6B.1@7950,2500 7950,2730.7 8086,2866.7 8086,2980.8 8191,3085.8 8191,4260.6 8404.4,4474 ; P3B.99@8755.52,4621.61 8812,4621.61 8842,4591.61 8842,4522.2 8793.8,4474 ; 8404.4,4474 8793.8,4474 ; 8404.4,4474 8793.8,4474
VOGC: P3C.99 TP6C.1 | length 3177.5
  Top Layer (*.GTL) w10: TP6C.1@9250,2500 9250,2730.7 9386,2866.7 9386,2980.8 9491,3085.8 9491,4260.6 9704.4,4474 ; P3C.99@10055.52,4621.61 10112,4621.61 10142,4591.61 10142,4522.2 10093.8,4474 ; 9704.4,4474 10093.8,4474 ; 9704.4,4474 10093.8,4474
VRDA: P3A.97 TP7A.1 | length 2612.6
  Top Layer (*.GTL) w10: TP7A.1@6800,2650 6800,2860.9 6905,2965.9 6905,4254.8 7110.2,4460 7499.6,4460 7556,4516.4 7556,4602.61 7512,4646.61 P3A.97@7455.52,4646.61
VRDB: P3B.97 TP7B.1 | length 3002
  Top Layer (*.GTL) w10: TP7B.1@8100,2650 8100,2860.9 8205,2965.9 8205,4254.8 8410.2,4460 ; P3B.97@8755.52,4646.61 8812,4646.61 8856,4602.61 8856,4516.4 8799.6,4460 ; 8410.2,4460 8799.6,4460 ; 8410.2,4460 8799.6,4460
VRDC: P3C.97 TP7C.1 | length 3002
  Top Layer (*.GTL) w10: TP7C.1@9400,2650 9400,2860.9 9505,2965.9 9505,4254.8 9710.2,4460 ; P3C.97@10055.52,4646.61 10112,4646.61 10156,4602.61 10156,4516.4 10099.6,4460 ; 9710.2,4460 10099.6,4460 ; 9710.2,4460 10099.6,4460
pads on no net: J1.5 J10.16 J10.31 J10.32 J10.33 J10.34 J11.2 P1A.4 P1A.6 P1A.8 P1A.10 P1A.14 P1A.16 P1A.18 P1A.20 P1A.23 P1A.24 P1A.25 P1A.26 P1A.27 P1A.28 P1A.29 P1A.30 P1A.33 P1A.34 P1A.35 P1A.36 P1A.37 P1A.38 P1A.39 P1A.40 P1A.44 P1A.46 P1A.48 P1A.49 P1A.50 P1A.55 P1A.56 P1A.57 P1A.58 P1A.59 P1A.60 P1A.61 P1A.62 P1A.65 P1A.66 P1A.67 P1A.68 P1A.69 P1A.70 P1A.71 P1A.72 P1A.75 P1A.76 P1A.77 P1A.78 P1A.79 P1A.80 P1A.82 P1A.85 P1A.86 P1A.87 P1A.88 P1A.90 P1A.91 P1A.92 P1A.95 P1A.96 P1A.97 P1A.101 P1A.107 P1A.108 P1A.109 P1A.110 P1A.111 P1A.112 P1A.113 P1A.114 P1A.117 P1A.118 P1A.119 P1A.121 P1A.122 P1A.123 P1A.124 P1A.127 P1A.128 P1A.129 P1A.130 P1A.131 P1A.132 P1A.133 P1A.134 P1A.137 P1A.139 P1A.141 P1B.4 P1B.6 P1B.8 P1B.10 P1B.14 P1B.16 P1B.18 P1B.20 P1B.23 P1B.24 P1B.25 P1B.26 P1B.27 P1B.28 P1B.29 P1B.30 P1B.33 P1B.34 P1B.35 P1B.36 P1B.37 P1B.38 P1B.39 P1B.40 P1B.44 P1B.46 P1B.48 P1B.49 P1B.50 P1B.55 P1B.56 P1B.57 P1B.58 P1B.59 P1B.60 P1B.61 P1B.62 P1B.65 P1B.66 P1B.67 P1B.68 P1B.69 P1B.70 P1B.71 P1B.72 P1B.75 P1B.76 P1B.77 P1B.78 P1B.79 P1B.80 P1B.82 P1B.85 P1B.86 P1B.87 P1B.88 P1B.90 P1B.91 P1B.92 P1B.95 P1B.96 P1B.97 P1B.101 P1B.107 P1B.108 P1B.109 P1B.110 P1B.111 P1B.112 P1B.113 P1B.114 P1B.117 P1B.118 P1B.119 P1B.121 P1B.122 P1B.123 P1B.124 P1B.127 P1B.128 P1B.129 P1B.130 P1B.131 P1B.132 P1B.133 P1B.134 P1B.137 P1B.139 P1B.141 P1C.4 P1C.6 P1C.8 P1C.10 P1C.14 P1C.16 P1C.18 P1C.20 P1C.23 P1C.24 P1C.25 P1C.26 P1C.27 P1C.28 P1C.29 P1C.30 P1C.33 P1C.34 P1C.35 P1C.36 P1C.37 P1C.38 P1C.39 P1C.40 P1C.44 P1C.46 P1C.48 P1C.49 P1C.50 P1C.55 P1C.56 P1C.57 P1C.58 P1C.59 P1C.60 P1C.61 P1C.62 P1C.65 P1C.66 P1C.67 P1C.68 P1C.69 P1C.70 P1C.71 P1C.72 P1C.75 P1C.76 P1C.77 P1C.78 P1C.79 P1C.80 P1C.82 P1C.85 P1C.86 P1C.87 P1C.88 P1C.90 P1C.91 P1C.92 P1C.95 P1C.96 P1C.97 P1C.101 P1C.107 P1C.108 P1C.109 P1C.110 P1C.111 P1C.112 P1C.113 P1C.114 P1C.117 P1C.118 P1C.119 P1C.121 P1C.122 P1C.123 P1C.124 P1C.127 P1C.128 P1C.129 P1C.130 P1C.131 P1C.132 P1C.133 P1C.134 P1C.137 P1C.139 P1C.141 P2.120 P3A.24 P3A.26 P3A.28 P3A.30 P3A.34 P3A.35 P3A.36 P3A.37 P3A.38 P3A.39 P3A.40 P3A.43 P3A.44 P3A.45 P3A.47 P3A.48 P3A.49 P3A.50 P3A.55 P3A.56 P3A.57 P3A.58 P3A.59 P3A.60 P3A.61 P3A.62 P3A.65 P3A.66 P3A.67 P3A.68 P3A.69 P3A.70 P3A.71 P3A.72 P3A.75 P3A.76 P3A.77 P3A.78 P3A.79 P3A.80 P3A.81 P3A.82 P3A.85 P3A.86 P3A.87 P3A.88 P3A.89 P3A.90 P3A.91 P3A.92 P3A.96 P3A.98 P3A.100 P3A.102 P3A.108 P3B.24 P3B.26 P3B.28 P3B.30 P3B.34 P3B.35 P3B.36 P3B.37 P3B.38 P3B.39 P3B.40 P3B.43 P3B.44 P3B.45 P3B.47 P3B.48 P3B.49 P3B.50 P3B.55 P3B.56 P3B.57 P3B.58 P3B.59 P3B.60 P3B.61 P3B.62 P3B.65 P3B.66 P3B.67 P3B.68 P3B.69 P3B.70 P3B.71 P3B.72 P3B.75 P3B.76 P3B.77 P3B.78 P3B.79 P3B.80 P3B.81 P3B.82 P3B.85 P3B.86 P3B.87 P3B.88 P3B.89 P3B.90 P3B.91 P3B.92 P3B.96 P3B.98 P3B.100 P3B.102 P3B.108 P3C.24 P3C.26 P3C.28 P3C.30 P3C.34 P3C.35 P3C.36 P3C.37 P3C.38 P3C.39 P3C.40 P3C.43 P3C.44 P3C.45 P3C.47 P3C.48 P3C.49 P3C.50 P3C.55 P3C.56 P3C.57 P3C.58 P3C.59 P3C.60 P3C.61 P3C.62 P3C.65 P3C.66 P3C.67 P3C.68 P3C.69 P3C.70 P3C.71 P3C.72 P3C.75 P3C.76 P3C.77 P3C.78 P3C.79 P3C.80 P3C.81 P3C.82 P3C.85 P3C.86 P3C.87 P3C.88 P3C.89 P3C.90 P3C.91 P3C.92 P3C.96 P3C.98 P3C.100 P3C.102 P3C.108 P4.8 P4.10 P4.14 P4.16 P4.18 P4.20 P4.24 P4.26 P4.28 P4.30 P4.34 P4.36 P4.38 P4.40 P4.44 P4.48 P4.50 P4.55 P4.56 P4.57 P4.58 P4.59 P4.60 P4.61 P4.62 P4.95 P4.96 P4.97 P4.98 P4.99 P4.100 P4.101 P4.102 P4.107 P4.108 P4.109 P4.110 P4.111 P4.112 P4.113 P4.114 P4.117 P4.119 P4.121 P4.123 P4.127 P4.129 P4.131 P4.133 P4.137 P4.139 P4.141 P4.143 P4.147 P4.148 P4.149 P4.150 P4.151 P4.152 P4.153 P4.154 P6.24 P6.26 P6.28 P6.30 P6.34 P6.35 P6.36 P6.37 P6.38 P6.39 P6.40 P6.43 P6.44 P6.45 P6.47 P6.48 P6.49 P6.50 P6.55 P6.56 P6.57 P6.58 P6.59 P6.60 P6.61 P6.62 P6.65 P6.66 P6.67 P6.68 P6.69 P6.70 P6.71 P6.72 P6.75 P6.76 P6.77 P6.78 P6.79 P6.80 P6.81 P6.82 P6.85 P6.86 P6.87 P6.88 P6.89 P6.90 P6.91 P6.92 P6.96 P6.98 P6.100 P6.102 P6.108 P7.4 P7.6 P7.8 P7.10 P7.14 P7.16 P7.18 P7.20 P7.23 P7.24 P7.25 P7.26 P7.27 P7.28 P7.29 P7.30 P7.33 P7.34 P7.35 P7.36 P7.37 P7.38 P7.39 P7.40 P7.44 P7.46 P7.48 P7.49 P7.50 P7.55 P7.56 P7.57 P7.58 P7.59 P7.60 P7.61 P7.62 P7.65 P7.66 P7.67 P7.68 P7.69 P7.70 P7.71 P7.72 P7.75 P7.76 P7.77 P7.78 P7.79 P7.80 P7.82 P7.85 P7.86 P7.87 P7.88 P7.90 P7.91 P7.92 P7.95 P7.96 P7.97 P7.101 P7.107 P7.108 P7.109 P7.110 P7.111 P7.112 P7.113 P7.114 P7.117 P7.118 P7.119 P7.121 P7.122 P7.123 P7.124 P7.127 P7.128 P7.129 P7.130 P7.131 P7.132 P7.133 P7.134 P7.137 P7.139 P7.141 U1.8 U1.9 U1.10 U3.6 U3.8 U3.9 U3.10 U3.11 U3.12 U3.13 U15.1 U15.3 U15.5 U15.7 U15.8
copper on no net: | length 857.4
  Bottom Layer (*.GBL) w20: 10295,7600 ccw(c10322.5,7642.5) 10300.83,7688.25 ; 10427.96,7640 ccw(c10325,7640) 10427.96,7640

## Polygon pours and split planes (outlines as drawn)
GND on DIG GND (*.GP1) (split plane): 16979.9,20.1 20.1,20.1 20.1,7979.9 16979.9,7979.9
A on AGND (*.GP2) (split plane): 16979.9,20.1 20.1,20.1 20.1,7979.9 16979.9,7979.9

## Other copper
Top Layer (*.GTL):
  text "*.GTL - TOP LAYER GERBER DATA" at 4996,-1155.31 h80
MidLayer1 (*.G1):
  text "*.G1 - MID LAYER 1 GERBER DATA" at 4996,-1323.1 h80
MidLayer2 (*.G2):
  text "*.G2 - MID LAYER 2 GERBER DATA" at 4996,-1490.88 h80
MidLayer3 (*.G3):
  text "*.G3 - MID LAYER 3 GERBER DATA" at 4996,-1658.66 h80
Bottom Layer (*.GBL):
  text "2009" at 10115,7590 h100
  text "Las Cumbres Observatory" at 10525,7390 h100
  text "*.GBL - BOTTOM LAYER GERBER DATA" at 4996,-2162 h80
DIG GND (*.GP1) (plane layer: these items are gaps in the copper):
  text "*.GP1 - INTERNAL PLANE LAYER 1 GERBER DATA" at 4996,-1826.44 h80
AGND (*.GP2) (plane layer: these items are gaps in the copper):
  text "*.GP2 - INTERNAL PLANE LAYER 2 GERBER DATA" at 4996,-1994.22 h80

## Silkscreen, mask and mechanical layers (free items; w line width, h text height)
Top Overlay:
  region: 4800,500 4300,500 4300,200 4800,200
  text "RG" at 2087,7777 h50
  text "SG" at 1766,7776 h50
  text "DC_HOLD" at 1304,7685 h50
  text "GPS 1Hz" at 5049,7652 h50
  text "AGND" at 7831,7585 h50
  text "LED 2" at 6046,7531 h50 r90
  text "LED 5" at 6481,7529 h50 r90
  text "LED 6" at 6640,7527 h50 r90
  text "LED 1" at 5908,7525 h50 r90
  text "LED 3" at 6196,7516 h50 r90
  text "LED 4" at 6343,7489 h50 r90
  text "+28V" at 263,7154 h50
  text "+12V" at 261,6972 h50
  text "-12V" at 259,6764 h50
  text "+5ANA" at 236,6534 h50
  text "-5ANA" at 255,6377 h50
  text "VCC" at 284,6173 h50
  text "A" at 139,6016 h50 r90
  text "GND" at 248,6013 h50 r90
  text "AGND" at 158,5308 h50
  text "DGND" at 153,4672 h50
  text "SG" at 14459,4294 h50
  text "S2Q1" at 14679,4294 h50
  text "P2A" at 14955,4293 h50
  text "S1Q2" at 15187,4292 h50
  text "RG" at 15482,4292 h50
  text "S1Q4" at 15701,4289 h50
  text "S2Q3" at 15957,4288 h50
  text "VDD" at 16257,4286 h50
  text "P2B" at 14512,3682 h50
  text "P1B" at 14783,3681 h50
  text "S3" at 15051,3677 h50
  text "P1A" at 15291,3676 h50
  text "S1Q3" at 16038,3674 h50
  text "P3A" at 15549,3673 h50
  text "VOD" at 15792,3670 h50
  text "TGA" at 14614,3106 h50
  text "S1Q1" at 14854,3103 h50
  text "P3B" at 15117,3102 h50
  text "TGB" at 14343,3101 h50
  text "S2Q2" at 15335,3100 h50
  text "VRD" at 15628,3096 h50
  text "S2Q4" at 15859,3091 h50
  text "VOG" at 16134,3085 h50
  text "VDD" at 6595,2870 h40
  text "VDD" at 7895,2870 h40
  text "VDD" at 9195,2870 h40
  text "VRD" at 6770,2715 h40
  text "VRD" at 8070,2715 h40
  text "VRD" at 9370,2715 h40
  text "CSU" at 6258,2681 h180 r90
  text "VOG" at 6595,2565 h40
  text "VOG" at 7895,2565 h40
  text "VOG" at 9195,2565 h40
  text "ASP#1" at 1065,2467 h180 r90
  text "CLK#1" at 7641,2458 h180 r90
  text "CLK#4" at 11522,2458 h180 r90
  text "ASP#3" at 3795,2440 h180 r90
  text "CLK#3" at 10301,2414 h180 r90
  text "VOD" at 6785,2410 h40
  text "VOD" at 8085,2410 h40
  text "VOD" at 9385,2410 h40
  text "ASP#2" at 2412,2396 h180 r90
  text "ASP#4" at 5084,2378 h180 r90
  text "CLK#2" at 8980,2378 h180 r90
  text "TT BRD" at 13219,2310.36 h180 r90
  text "A4OUT" at 5471,2173 h50
  text "P3A" at 7525,2133 h40
  text "P3A" at 8845,2128 h40
  text "P3A" at 10145,2128 h40
  text "S2Q1" at 6935,2125 h40
  text "S2Q1" at 8255,2120 h40
  text "S2Q1" at 9555,2120 h40
  text "S1Q1" at 7517,1928 h40
  text "S1Q1" at 10119,1924 h40
  text "S1Q1" at 8837,1923 h40
  text "S3" at 8250,1920 h40
  text "S3" at 6943,1916 h40
  text "S3" at 9563,1911 h40
  text "A3OUT" at 5469,1897 h50
  text "P2B" at 6947,1728 h40
  text "P3B" at 7541,1728 h40
  text "P2B" at 8267,1723 h50
  text "P3B" at 8861,1723 h40
  text "P2B" at 9567,1723 h40
  text "P3B" at 10161,1723 h40
  text "A2OUT" at 5474,1575 h50
  text "S1Q2" at 7521,1531 h40
  text "S1Q2" at 8841,1526 h40
  text "S1Q2" at 10141,1526 h40
  text "S2Q4" at 6943,1523 h40
  text "S2Q4" at 8263,1518 h50
  text "S2Q4" at 9563,1518 h40
  text "TGA" at 7545,1334 h40
  text "TGA" at 8865,1329 h40
  text "TGA" at 10165,1329 h40
  text "P2A" at 6951,1326 h40
  text "P2A" at 8271,1321 h40
  text "P2A" at 9571,1321 h40
  text "A1OUT" at 5480,1276 h50
  text "S1Q3" at 7513,1138 h40
  text "S1Q3" at 8833,1133 h40
  text "S1Q3" at 10133,1133 h40
  text "S2Q3" at 6935,1126 h40
  text "S2Q3" at 8255,1121 h40
  text "S2Q3" at 9555,1121 h40
  text "TGB" at 7529,937 h40
  text "TGB" at 8849,932 h40
  text "TGB" at 10149,932 h40
  text "P1B" at 6951,921 h40
  text "P1B" at 8271,916 h40
  text "P1B" at 9571,916 h40
  text "S1Q4" at 7525,737 h40
  text "S1Q4" at 8845,732 h40
  text "S1Q4" at 10145,732 h40
  text "S2Q2" at 6943,729 h40
  text "S2Q2" at 8263,724 h40
  text "S2Q2" at 9563,724 h40
  text "RG" at 7533,532 h40
  text "RG" at 8853,527 h40
  text "RG" at 10153,527 h40
  text "P1A" at 6955,516 h40
  text "P1A" at 8275,511 h40
  text "P1A" at 9575,511 h40
  text "AGND" at 667,338 h50
  text "SG" at 7529,335 h40
  text "SG" at 8849,330 h40
  text "SG" at 10149,330 h40
  text "SINISTRO TESTBED SCH REV." at 1800,300 h100
  text "AGND" at 5703,254 h50
  text "*.GTO - TOP OVERLAY GERBER DATA" at 4996,-651.97 h80
Top Paste:
  text "*.GTP - TOP-SIDE SOLDER PASTE MASK" at 4995.99,-987.54 h80
Top Solder:
  text "*.GTS - TOP SOLDER MASK GERBER DATA" at 4996,-819.75 h80
Mechanical 1:
  the board outline again, w50
Mechanical 2:
  lines w10: 14650,-5728 -6350,-5728 -6350,10272 17639,10272 ; 17650,-5728 17650,10272 ; 13595,-5622 ccw(c13645,-5622) 13645,-5672 13975,-5672 ccw(c13975,-5632) 14015,-5632 14015,-5462 ccw(c13975,-5462) 13975,-5422 13595,-5422 13595,-5622 ; 13595,-5332 ccw(c13645,-5332) 13645,-5382 17545,-5382 ccw(c17545,-5332) 17595,-5332 17595,-5142 ccw(c17545,-5142) 17545,-5092 13595,-5092 13595,-5332 ; 13595,-5002 ccw(c13645,-5002) 13645,-5052 15525,-5052 ccw(c15525,-5002) 15575,-5002 15575,-4852 ccw(c15525,-4852) 15525,-4802 13595,-4802 13595,-5002 ; 13595,-4722 ccw(c13635,-4722) 13635,-4762 14445,-4762 ccw(c14445,-4712) 14495,-4712 14495,-4562 ccw(c14445,-4562) 14445,-4512 13595,-4512 13595,-4722 ; 14055,-5632 ccw(c14095,-5632) 14095,-5672 16055,-5672 ccw(c16055,-5632) 16095,-5632 16095,-5462 ccw(c16055,-5462) 16055,-5422 14055,-5422 14055,-5632 ; 14535,-4712 ccw(c14585,-4712) 14585,-4762 15525,-4762 ccw(c15525,-4712) 15575,-4712 15575,-4562 ccw(c15525,-4562) 15525,-4512 14535,-4512 14535,-4712 ; 15615,-5002 ccw(c15665,-5002) 15665,-5052 17545,-5052 ccw(c17545,-5002) 17595,-5002 17595,-4852 ccw(c17545,-4852) 17545,-4802 15615,-4802 15615,-5002 ; 15615,-4712 ccw(c15665,-4712) 15665,-4762 16605,-4762 ccw(c16605,-4712) 16655,-4712 16655,-4562 ccw(c16605,-4562) 16605,-4512 15615,-4512 15615,-4712 ; 16135,-5622 ccw(c16185,-5622) 16185,-5672 16515,-5672 ccw(c16515,-5632) 16555,-5632 16555,-5462 ccw(c16515,-5462) 16515,-5422 16135,-5422 16135,-5622 ; 16595,-5632 ccw(c16635,-5632) 16635,-5672 17545,-5672 ccw(c17545,-5622) 17595,-5622 17595,-5472 ccw(c17545,-5472) 17545,-5422 16595,-5422 16595,-5632 ; 16695,-4712 ccw(c16745,-4712) 16745,-4762 17545,-4762 ccw(c17545,-4712) 17595,-4712 17595,-4562 ccw(c17545,-4562) 17545,-4512 16695,-4512 16695,-4712
  lines w20: -6329.94,-5082.12 cw(c-6280,-5157) -6280,-5067 -5820,-5067 cw(c-5820,-5157) -5730,-5157 -5730,-5207 ccw(c-5720,-5207) -5720,-5217 -3080,-5217 cw(c-3080,-5307) -2990,-5307 -2990,-5647 cw(c-3080,-5647) -3005.12,-5696.94 ; 13551.17,-5711.98 cw(c13645,-5622) 13515,-5622 13515,-3952 cw(c13645,-3952) 13645,-3822 17545,-3822 cw(c17545,-3952) 17633.66,-3856.92 ; -6330,-5647 ccw(c-6280,-5647) -6280,-5697 -3080,-5697 ccw(c-3080,-5647) -3030,-5647 -3030,-5307 ccw(c-3080,-5307) -3080,-5257 -5720,-5257 cw(c-5720,-5207) -5770,-5207 -5770,-5157 ccw(c-5820,-5157) -5820,-5107 -6280,-5107 ccw(c-6280,-5157) -6330,-5157 -6330,-5647 ; 1180,-5548 ccw(c1310,-5548) 1310,-5678 6050,-5678 ccw(c6050,-5548) 6180,-5548 6180,-3958 ccw(c6050,-3958) 6050,-3828 1310,-3828 ccw(c1310,-3958) 1180,-3958 1180,-5548 ; 13555,-5622 ccw(c13645,-5622) 13645,-5712 17545,-5712 ccw(c17545,-5622) 17635,-5622 17635,-3952 ccw(c17545,-3952) 17545,-3862 13645,-3862 ccw(c13645,-3952) 13555,-3952 13555,-5622
  lines w21: -5762,-869.83 -798,-869.83 ; -5762,-483.93 -798,-483.93 ; -5822,-3497 ccw(c-5697,-3497) -5697,-3622 -863,-3622 ccw(c-863,-3497) -738,-3497 -738,-222 ccw(c-863,-222) -863,-97 -5697,-97 ccw(c-5697,-222) -5822,-222 -5822,-3497
  lines w24: 3730,-5518 3880,-5518 ; 3730,-5268 3880,-5268 ; 3730,-5018 3880,-5018 ; 3730,-4768 3880,-4768 ; 3730,-4518 3880,-4518
  lines w30: 18150,10772 18150,-6228 15150,-6228 -6850,-6228 -6850,10772 18173,10772
  lines w50: 13740,-4363 15390,-4363 ; 13740,-3983 15390,-3983 ; 15390,-4363 13730,-4363 13730,-3983 15390,-3983 ; 15390,-4363 15390,-3983
  text "NOTES (UNLESS OTHERWISE SPECIFIED):" at -6030,9748 h90
  text "GENERAL" at -5930,9548 h90
  text "1)" at -5830,9347.95 h75
  text "PCB IS 10-LAYER, .062\" THICK." at -5630,9347.97 h75
  text "2)" at -5830,9197.95 h75
  text "CONSTRUCTION IS SOLDER-MASK-OVER-BARE-COPPER (SMOBC)." at -5630,9197.95 h75
  text "3)" at -5830,9047.95 h75
  text "ACCEPTABILITY SHALL BE BASED ON IPC-A-600, CLASS 2." at -5630,9047.95 h75
  text "4)" at -5830,8897.95 h75
  text "THE FOLLOWING GERBER RS274X PHOTO TOOL FILES SHALL BE USED TO DEFINE ALL CIRCUIT FEATURES:" at -5630,8897.95 h75
  text "*.GTL - TOP LAYER GERBER DATA" at -5456,8708 h80
  text "*.G1 - MID LAYER 1 GERBER DATA" at -5456,8517.73 h80
  text "*.G2 - MID LAYER 2 GERBER DATA" at -5455,8319 h80
  text "*.G3 - MID LAYER 3 GERBER DATA" at -5455,8140 h80
  text "*.GP1- INTERNAL PLANE LAYER 1 GERBER DATA" at -5414,7938.47 h80
  text "*.GP2 - INTERNAL PLANE LAYER 2 GERBER DATA" at -5414,7748.2 h80
  text "*.GBL - BOTTOM LAYER GERBER DATA" at -5420,7508 h80
  text "*.GTO - TOP OVERLAY GERBER DATA" at -5476,7290 h80
  text "*.GTP - TOP-SIDE SOLDER PASTE MASK" at -5467,7098 h80
  text "*.GTS - TOP SOLDER MASK GERBER DATA" at -5459,6923 h80
  text "5)" at -5892,5632.23 h75
  text "THE PHOTO TOOL SHALL NOT BE COMPENSATED WITHOUT PRIOR ENGINEERING APPROVAL." at -5692,5632.23 h75
  text "PCB DESIGNER: RICH LOBDILL   PH (805) 880-1621  FAX (805) 961-1792." at -5692,5482.28 h75
  text "FABRICATION TOLERANCES" at -5872,5190 h90
  text "6)" at -5772,4989.95 h75
  text "END PRODUCT CONDUCTOR WIDTHS AND PAD DIAMETERS SHALL NOT VARY MORE THAN" at -5572,4989.95 h75
  text "0.002\" FROM THE 1:1 DIMENSIONS OF THE MASTER ARTWORK." at -5572,4840 h75
  text "7)" at -5772,4689.95 h75
  text "THE CONDUCTIVE PATTERN SHALL BE POSITIONED SO THAT THE LOCATION OF ANY PAD OR" at -5572,4689.95 h75
  text "LAND SHALL BE WITHIN 0.005\" DIAMETER TO THE TRUE POSITION OF THE HOLE IT CIRCUMSCRIBES." at -5572,4540 h75
  text "8)" at -5772,4389.95 h75
  text "ALL DRILL HOLE SIZES AND TOLERANCES APPLY AFTER PLATING." at -5572,4389.95 h75
  text "9)" at -5772,4239.95 h75
  text "THE MINIMUM ANNULAR RING SHALL BE 0.005\"." at -5572,4239.95 h75
  text "10)" at -5827,4089.95 h75
  text "BOW AND TWIST SHALL NOT EXCEED 0.010\" PER INCH." at -5572,4089.95 h75
  text "11)" at -5817,3939.95 h75
  text "FOR PCB ROUTING DIMENSIONS: .XXX = +/-.005\"  .XX = +/-.020\"" at -5572,3939.95 h75
  text "MATERIAL" at -5872,3740 h90
  text "12)" at -5827,3539.95 h75
  text "BASE MATERIAL IS FR4 EPOXY FIBERGLASS" at -5565,3534 h75
  text "SEE STACK-UP LEGEND FOR COPPER CLADDING CALL OUTS" at -5565,3394 h75
  text "13)" at -5827,3389.95 h75
  text "PLATING" at -5872,3190 h90
  text "14)" at -5827,2994.95 h75
  text "ALL HOLES AND CONDUCTIVE SURFACES SHALL BE PLATED WITH A MINIMUM OF 0.001\" COPPER." at -5572,2994.95 h75
  text "15)" at -5827,2844.95 h75
  text "AFTER SOLDERMASK, ALL EXPOSED HOLES AND CONDUCTIVE SURFACES SHALL BE COATED" at -5572,2844.95 h75
  text "WITH A GOLD IMMERSION PLATING TO PRESERVE SOLDERABILITY." at -5565,2694 h75
  text "COATINGS" at -5872,2495 h90
  text "16)" at -5822,2299.95 h75
  text "THE SOLDERMASK SHALL BE BLACK LIQUID PHOTO-IMAGEABLE PER IPC-SM-840, TYPE-B, CLASS 2." at -5572,2299.95 h75
  text "17)" at -5827,2149.95 h75
  text "THE SOLDERMASK REGISTRATION ALLOWANCE IS 0.003\".  THERE SHALL BE NO SOLDERMASK ON" at -5572,2149.95 h75
  text "ANY SOLDER PAD OR LAND." at -5572,1999.95 h75
  text "MARKING" at -5872,1800 h90
  text "18)" at -5827,1604.95 h75
  text "THE LEGEND SHALL BE SCREEN-PRINTED USING PERMANENT YELLOW EPOXY INK." at -5572,1604.95 h75
  text "19)" at -5827,1454.95 h75
  text "THE SCREEN PRINTING REGISTRATION ALLOWANCE IS 0.007\".  THERE SHALL BE NO INK ON ANY" at -5572,1454.95 h75
  text "SOLDER PAD OR LAND." at -5572,1305 h75
  text "20)" at -5837,1154.95 h75
  text "THE VENDOR CODE AND UL FLAMMABILITY RATING MAY BE ETCHED IN THE FOIL OR MARKED IN" at -5572,1154.95 h75
  text "PERMANENT EPOXY INK (VENDOR'S OPTION)." at -5572,1005 h75
  text "ELECTRICAL TESTING" at -5872,805 h90
  text "21)" at -5827,609.95 h75
  text "ALL BOARDS SHALL BE ELECTRICALLY TESTED TO THE SUPPLIED IPC-D-356A NET LIST" at -5572,609.95 h75
  text "FOR CONTINUITY, OPENS AND SHORTS." at -5572,460 h75
  text "Layer Stack Up Detail for: Sinistro_TestBed_RevA.PcbDoc" at -5762,-351.17 h89
  text "Layer" at -5762,-627.93 h89
  text "COPPER CLADDING" at -2910,-725 h125
  text "Name" at -5762,-805.93 h89
  text "Top Layer (*.GTL)" at -5762,-1061.88 h125
  text "1/2 OZ, 1 OZ FINISHED" at -2910,-1080 h100
  text "1/2 OZ" at -2901,-1409 h100
  text "MidLayer1 (*.G1)" at -5762,-1424.98 h125
  text "1/2 OZ" at -2914,-1763 h100
  text "MidLayer2 (*.G2)" at -5762,-1788.07 h125
  text "1/2 OZ" at -2914,-2130 h100
  text "MidLayer3 (*.G3)" at -5762,-2151.17 h125
  text "1/2 OZ" at -2922,-2502 h100
  text "DIG GND (*.GP1)" at -5762,-2514.26 h125
  text "1/2 OZ" at -2935,-2856 h100
  text "AGND (*.GP2)" at -5762,-2877.36 h125
  text "Bottom Layer (*.GBL)" at -5762,-3240.45 h125
  text "1/2 OZ, 1 OZ FINISHED" at -3025,-3249 h100
  text "Las Cumbres Observatory, Inc." at 15560,-4003 h90
  text "Las Cumbres Observatory" at 13790,-4123 h150
  text "PRIMARY PCB SPECIFICATIONS" at 1627,-4138 h200
  text "6740 Cortona Dr." at 16000,-4157 h90
  text "Global Telescope Network" at 13950,-4283 h125
  text "Goleta, CA 93117" at 15950,-4307 h90
  text "(REFER TO COMPLETE SPEC LISTING AT LEFT FOR FURTHER DETAILS)" at 1280,-4343 h100
  text "www.lcogt.net" at 16090,-4453 h90
  text "DATE" at 13615,-4563.8 h32
  text "DESIGNED" at 14555,-4563.8 h32
  text "DRAWN" at 15635,-4563.8 h32
  text "SCALE" at 16715,-4563.8 h32
  text "NUMBER OF LAYERS" at 1380,-4593 h150
  text "7" at 4930,-4593.02 h150
  text "Rich Lobdill" at 15940,-4663 h55
  text "Rich Lobdill" at 14815,-4668 h55
  text "1 : 1" at 17000,-4682 h90
  text "7/1/2009" at 13645,-4689 h90
  text "FINISHED THICKNESS" at 1380,-4843 h150
  text ".062\"" at 4755,-4843 h150
  text "CHECKED/DATE" at 13615,-4853.8 h32
  text "APPROVED/DATE" at 15635,-4853.8 h32
  text "BASE MATERIAL" at 1380,-5093 h150
  text "FR4" at 4680,-5093 h150
  text "TITLE" at 13615,-5143.8 h32
  text "NOTICE" at -6275,-5252 h100
  text "SINISTRO TESTBED" at 13835,-5288 h100
  text "GOLD IMMERSION" at 4186,-5310 h150
  text "PLATING TYPE" at 1380,-5343 h150
  text "THIS DRAWING EMBODIES A PROPRIETARY DESIGN OWNED BY LAS CUMBRES" at -6240,-5367 h60
  text "OBSERVATORY.  IT IS SUBMITTED FOR A SPECIFIC PURPOSE UNDER A CON-" at -6240,-5467 h60
  text "SIZE" at 13615,-5473.8 h32
  text "DOC NO." at 14075,-5473.8 h32
  text "REV" at 16155,-5473.8 h32
  text "SHEET" at 16615,-5473.8 h32
  text "FIDENTIAL RELATIONSHIP, AND EXCEPT FOR PURPOSES EXPRESSLY GRANTED" at -6240,-5562 h60
  text "OF" at 17045,-5577 h60
  text "SOLDER MASK COLOR" at 1380,-5593 h150
  text "BLACK" at 4805,-5593 h150
  text "1" at 16875,-5597 h100
  text "X" at 17275,-5597 h100
  text "A" at 16300,-5610 h130
  text "-" at 14630,-5612 h130
  text "GPT" at 15349.72,-5626.8 h130
  text "C" at 13750,-5628 h100
  text "IN WRITING, ALL RIGHTS ARE RESERVED BY LAS CUMBRES OBSERVATORY." at -6240,-5652 h60
Mechanical 3:
  lines w62: 827.96,2339.02 835.96,7471.02 ; 2127.96,2339.02 2135.96,7471.02 ; 3427.96,2339.02 3435.96,7471.02 ; 4727.96,2339.02 4735.96,7471.02 ; 6027.96,2339.02 6035.96,7471.02 ; 7327.96,2339.02 7335.96,7471.02 ; 8627.96,2339.02 8635.96,7471.02 ; 9927.96,2339.02 9935.96,7471.02 ; 11227.96,2339.02 11235.96,7471.02 ; 12827.96,2339.02 12835.96,7471.02
Mechanical 5:
  text "SINISTRO TESTBED Rev. A" at 4995.99,-316.42 h80
  text "LAS CUMBRES OBSERVATORY     7/1/2009" at 4996,-472.76 h80
Mechanical 13:
  lines w62: 0,0 14000,0 17000,0 17000,4500 17000,8000 14000,8000 0,8000 0,100 0,0
Drill Drawing:
  lines w10: 14650,-5728 -6350,-5728 -6350,10272 17650,10272 17650,-5728 ; 13595,-5622 ccw(c13645,-5622) 13645,-5672 13975,-5672 ccw(c13975,-5632) 14015,-5632 14015,-5462 ccw(c13975,-5462) 13975,-5422 13595,-5422 13595,-5622 ; 13595,-5332 ccw(c13645,-5332) 13645,-5382 17545,-5382 ccw(c17545,-5332) 17595,-5332 17595,-5142 ccw(c17545,-5142) 17545,-5092 13595,-5092 13595,-5332 ; 13595,-5012 ccw(c13635,-5012) 13635,-5052 15055,-5052 ccw(c15055,-5002) 15105,-5002 15105,-4852 ccw(c15055,-4852) 15055,-4802 13595,-4802 13595,-5012 ; 14055,-5632 ccw(c14095,-5632) 14095,-5672 16055,-5672 ccw(c16055,-5632) 16095,-5632 16095,-5462 ccw(c16055,-5462) 16055,-5422 14055,-5422 14055,-5632 ; 15145,-5002 ccw(c15195,-5002) 15195,-5052 16605,-5052 ccw(c16605,-5002) 16655,-5002 16655,-4852 ccw(c16605,-4852) 16605,-4802 15145,-4802 15145,-5002 ; 16135,-5622 ccw(c16185,-5622) 16185,-5672 16515,-5672 ccw(c16515,-5632) 16555,-5632 16555,-5462 ccw(c16515,-5462) 16515,-5422 16135,-5422 16135,-5622 ; 16595,-5632 ccw(c16635,-5632) 16635,-5672 17545,-5672 ccw(c17545,-5622) 17595,-5622 17595,-5472 ccw(c17545,-5472) 17545,-5422 16595,-5422 16595,-5632 ; 16695,-5002 ccw(c16745,-5002) 16745,-5052 17545,-5052 ccw(c17545,-5002) 17595,-5002 17595,-4852 ccw(c17545,-4852) 17545,-4802 16695,-4802 16695,-5002
  lines w20: -6324.94,-5097.12 cw(c-6275,-5172) -6275,-5082 -5815,-5082 cw(c-5815,-5172) -5725,-5172 -5725,-5222 ccw(c-5715,-5222) -5715,-5232 -3075,-5232 cw(c-3075,-5322) -2985,-5322 -2985,-5662 cw(c-3075,-5662) -3000.12,-5711.94 ; 13549.92,-5710.66 cw(c13645,-5622) 13515,-5622 13515,-4802 cw(c13595,-4802) 13595,-4722 17545,-4722 cw(c17545,-4852) 17633.66,-4756.92 ; -6325,-5662 ccw(c-6275,-5662) -6275,-5712 -3075,-5712 ccw(c-3075,-5662) -3025,-5662 -3025,-5322 ccw(c-3075,-5322) -3075,-5272 -5715,-5272 cw(c-5715,-5222) -5765,-5222 -5765,-5172 ccw(c-5815,-5172) -5815,-5122 -6275,-5122 ccw(c-6275,-5172) -6325,-5172 -6325,-5662 ; 13555,-5622 ccw(c13645,-5622) 13645,-5712 17545,-5712 ccw(c17545,-5622) 17635,-5622 17635,-4852 ccw(c17545,-4852) 17545,-4762 13595,-4762 ccw(c13595,-4802) 13555,-4802 13555,-5622
  lines w30: 18135,10772 -6850,10772 -6850,-6228 18150,-6228 18150,10772
  text ".Legend" at 8700,-2800 h100
  text "DESIGNED" at 13615,-4853.8 h32
  text "DRAWN" at 15165,-4853.8 h32
  text "SCALE" at 16715,-4853.8 h32
  text "Rich Lobdill" at 14101,-4950 h55
  text "Rich Lobdill" at 15662,-4952 h55
  text "1 : 1" at 17000,-4972 h90
  text "TITLE" at 13615,-5143.8 h32
  text "NOTICE" at -6270,-5267 h100
  text "SINISTRO TESTBED" at 13832,-5288 h100
  text "THIS DRAWING EMBODIES A PROPRIETARY DESIGN OWNED BY LAS CUMBRES" at -6235,-5382 h60
  text "SIZE" at 13615,-5473.8 h32
  text "DOC NO." at 14075,-5473.8 h32
  text "REV" at 16155,-5473.8 h32
  text "SHEET" at 16615,-5473.8 h32
  text "OBSERVATORY.  IT IS SUBMITTED FOR A SPECIFIC PURPOSE UNDER A CON-" at -6235,-5482 h60
  text "FIDENTIAL RELATIONSHIP, AND EXCEPT FOR PURPOSES EXPRESSLY GRANTED" at -6235,-5577 h60
  text "OF" at 17045,-5577 h60
  text "2" at 16860,-5597 h100
  text "X" at 17275,-5597 h100
  text "-" at 14630,-5612 h130
  text "A" at 16295,-5612 h130
  text "C" at 13750,-5628 h120
  text "GD1" at 15450,-5628 h120
  text "IN WRITING, ALL RIGHTS ARE RESERVED BY LAS CUMBRES OBSERVATORY." at -6235,-5667 h60

## Dimensions
0,0 to 17000,0 on Mechanical 2
0,0 to 0,8000 on Mechanical 2

## Text inside footprints (layer, text, board x,y; h text height)
Designator41: Top Layer (*.GTL) "LCOGT" at 15358,449 h100; Top Solder "LCOGT" at 15358,449 h100
J10: Top Overlay "37" at 16911.92,5456.8 h59.05 r270; Top Overlay "20" at 16954.06,7289.94 h59.05 r270; Top Overlay "19" at 16587.92,5392.8 h59.05 r270; Top Overlay "1" at 16580.04,7309.84 h59.06 r270
P6: Top Overlay "155" at 11424.81,3761.97 h60 r270; Top Overlay "156" at 10972.06,3761.97 h60 r270; Top Overlay "2" at 10972.06,6104.49 h60 r270; Top Overlay "1" at 11424.81,6084.8 h60 r270
P7: Top Overlay "1" at 4531.11,3683.23 h60 r90; Top Overlay "2" at 4983.87,3663.54 h60 r90; Top Overlay "156" at 4983.87,6006.06 h60 r90; Top Overlay "155" at 4460,6019 h60 r90
Q3A: Top Overlay "1" at 251.48,3536.57 h40 r180; Top Overlay "3" at 260.54,3441.69 h40 r180
Q3B: Top Overlay "3" at 1560.54,3441.69 h40 r180; Top Overlay "1" at 1551.48,3536.57 h40 r180
Q3C: Top Overlay "1" at 2851.48,3536.57 h40 r180; Top Overlay "3" at 2860.54,3441.69 h40 r180
Q4A: Top Overlay "1" at 251.48,3836.57 h40 r180; Top Overlay "3" at 260.54,3741.69 h40 r180
Q4B: Top Overlay "3" at 1560.54,3741.69 h40 r180; Top Overlay "1" at 1551.48,3836.57 h40 r180
Q4C: Top Overlay "1" at 2851.48,3836.57 h40 r180; Top Overlay "3" at 2860.54,3741.69 h40 r180
Q5A: Top Overlay "1" at 251.48,4136.57 h40 r180; Top Overlay "3" at 260.54,4041.69 h40 r180
Q5B: Top Overlay "3" at 1560.54,4041.69 h40 r180; Top Overlay "1" at 1551.48,4136.57 h40 r180
Q5C: Top Overlay "1" at 2851.48,4136.57 h40 r180; Top Overlay "3" at 2860.54,4041.69 h40 r180
Q6A: Top Overlay "1" at 251.48,4436.57 h40 r180; Top Overlay "3" at 260.54,4341.69 h40 r180
Q6B: Top Overlay "3" at 1560.54,4341.69 h40 r180; Top Overlay "1" at 1551.48,4436.57 h40 r180
Q6C: Top Overlay "1" at 2851.48,4436.57 h40 r180; Top Overlay "3" at 2860.54,4341.69 h40 r180